# EAGLE board FINAL TRIWHEEL - Copy (EAGLE 9.6.0)
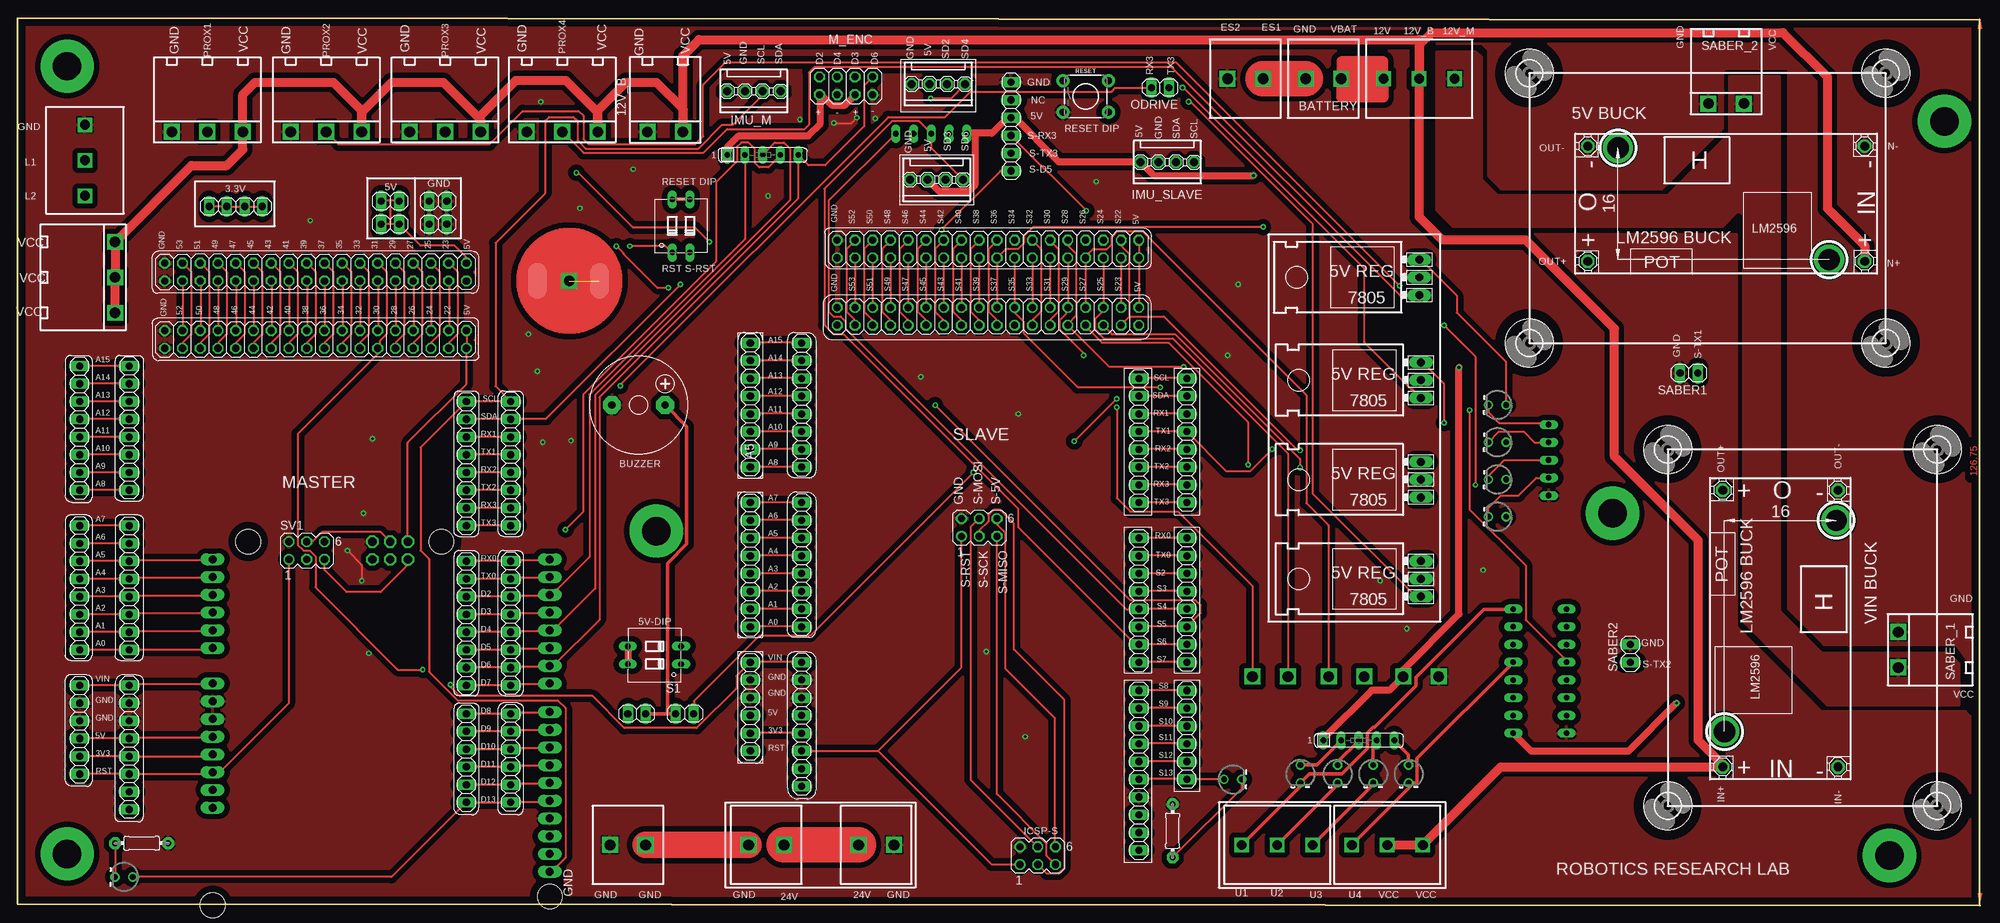
[diagram p0: board, top side]
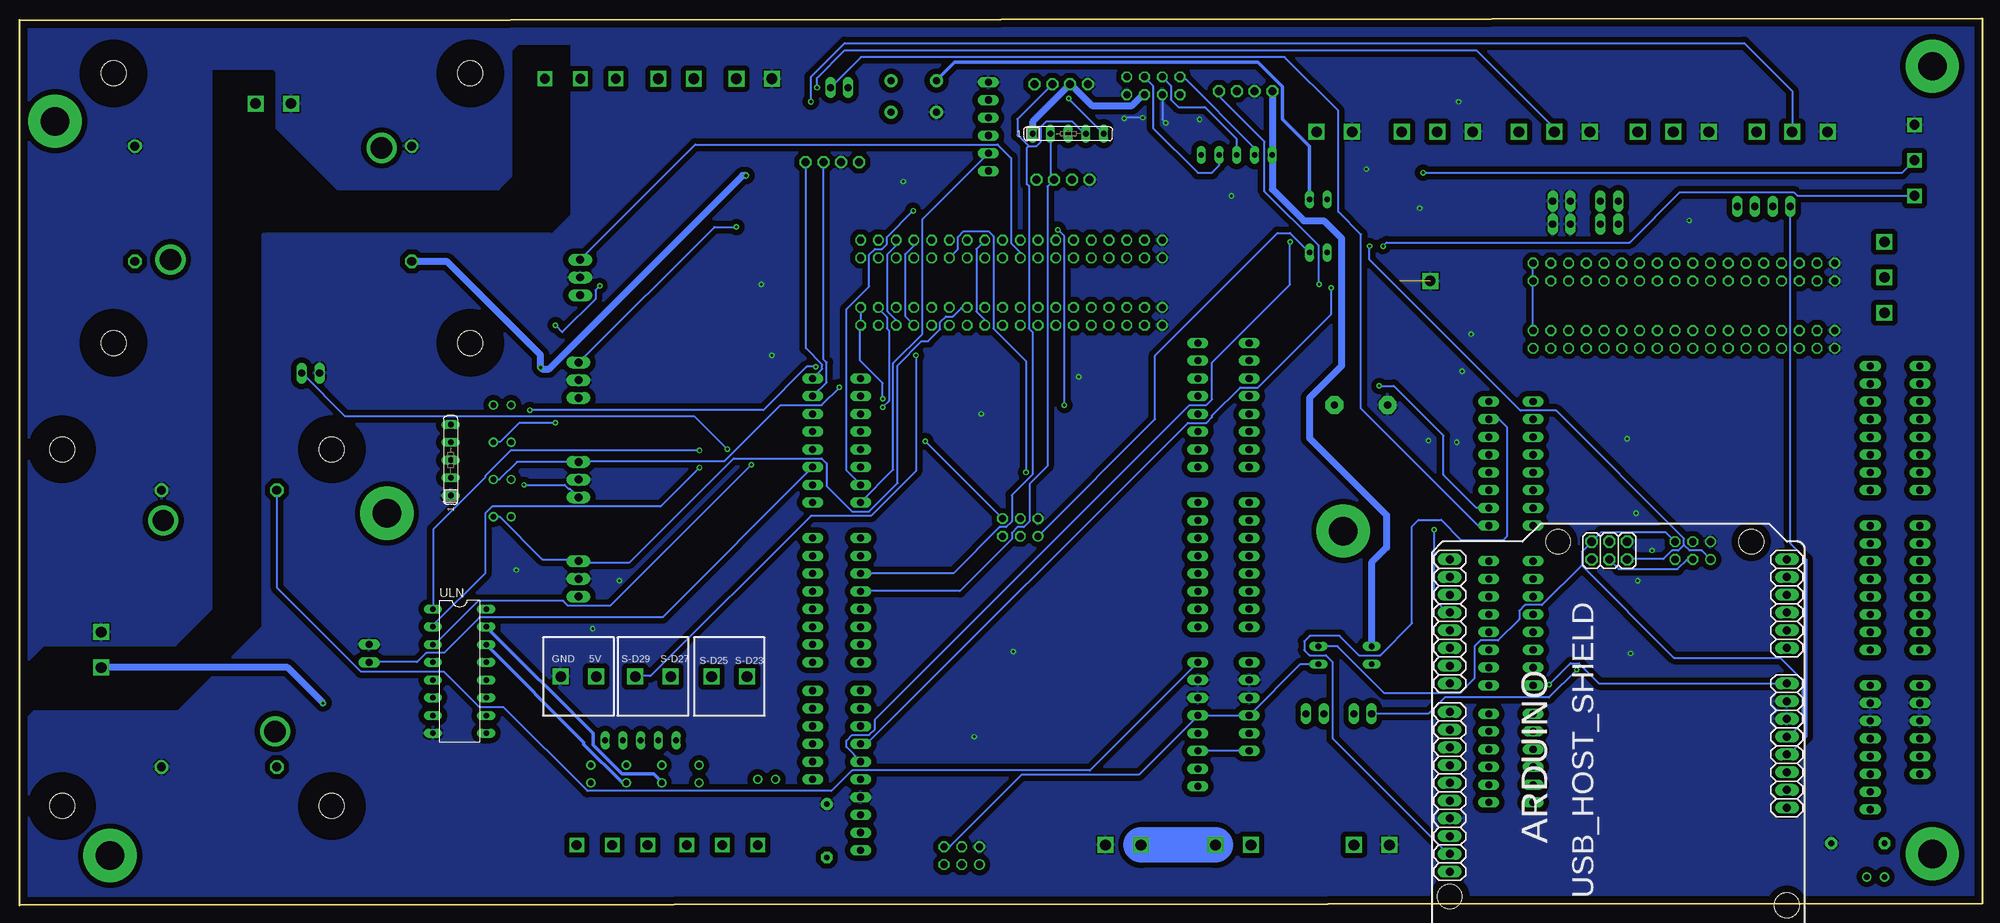
[diagram p1: board, bottom side, seen from below]

Size 280.92 x 127 mm. Coordinates in mm from the lower left corner, seen from the top.
Outline: 0,127 0,0.25 280.92,0 280.92,126.75 0,127
Copper layers (1*16): Top 0.035mm / dielectric 1.5mm / Bottom 0.035mm
Design rules "default *": minimum track width 12mil, minimum drill 0.35mm, track to track 12mil, track to pad 12mil, pad to pad 12mil, via to via 12mil, smd to smd 8mil, copper to edge 40mil, drill to drill 16mil, minimum pad ring 10mil, minimum via ring 8mil, stop-mask expansion 2mil, vias tented up to drill 0mil, thermal gap 10mil
Net classes: 0 default: width 0.305 mm, drill 0.33 mm, clearance 0.305 mm; 1 arduino: width 0.305 mm, drill 0.33 mm, clearance 0.305 mm; 2 signal: width 0.305 mm, drill 0.33 mm, clearance 0.305 mm to class 0, clearance 0.305 mm; 3 signal-1: width 0.508 mm, drill 0.381 mm, clearance 0.305 mm to class 0, clearance 0.305 mm to class 1, clearance 0.305 mm to class 2, clearance 0.305 mm; 4 signal-2: width 0.305 mm, drill 0.381 mm, clearance 0.305 mm to class 0, clearance 0.305 mm to class 1, clearance 0.305 mm to class 2, clearance 0.305 mm to class 3, clearance 0.305 mm; 5 signal-3: width 0.508 mm, drill 0.381 mm, clearance 0.305 mm to class 0, clearance 0.305 mm to class 1, clearance 0.305 mm to class 2, clearance 0.305 mm to class 3, clearance 0.305 mm to class 4, clearance 0.305 mm; 6 5v: width 1.016 mm, drill 0.406 mm, clearance 0.305 mm to class 0, clearance 0.305 mm to class 1, clearance 0.305 mm to class 2, clearance 0.305 mm to class 3, clearance 0.305 mm to class 4, clearance 0.305 mm to class 5, clearance 0.305 mm; 7 odrive: width 0.508 mm, drill 0.483 mm, clearance 0.305 mm; 8 nrf: width 0.305 mm, drill 0.33 mm, clearance 0.305 mm

## Footprints (pad centres in the part's own frame; a part is rotated, then mirrored left to right if it is on the bottom)
2X18 = drill 1.016 octagon: 1 -21.59,-1.27; 2 -21.59,1.27; 3 -19.05,-1.27; 4 -19.05,1.27; 5 -16.51,-1.27; 6 -16.51,1.27; 7 -13.97,-1.27; 8 -13.97,1.27; 9 -11.43,-1.27; 10 -11.43,1.27; 11 -8.89,-1.27; 12 -8.89,1.27; 13 -6.35,-1.27; 14 -6.35,1.27; 15 -3.81,-1.27; 16 -3.81,1.27; 17 -1.27,-1.27; 18 -1.27,1.27; 19 1.27,-1.27; 20 1.27,1.27; 21 3.81,-1.27; 22 3.81,1.27; 23 6.35,-1.27; 24 6.35,1.27; 25 8.89,-1.27; 26 8.89,1.27; 27 11.43,-1.27; 28 11.43,1.27; 29 13.97,-1.27; 30 13.97,1.27; 31 16.51,-1.27; 32 16.51,1.27; 33 19.05,-1.27; 34 19.05,1.27; 35 21.59,-1.27; 36 21.59,1.27
AB_RIGHT_TER_BLK = drill 1.524 square: 1 -5.842,2.794; 2 -5.842,-2.286
AB_SCREW_TERMINAL_5MM_2PIN = drill 1.524 square: 1 0,2.54; 2 0,-2.54
1X08 = drill 1.016 long: 1 -8.89,0; 2 -6.35,0; 3 -3.81,0; 4 -1.27,0; 5 1.27,0; 6 3.81,0; 7 6.35,0; 8 8.89,0
1X02 = drill 1.016 long: 1 -1.27,0; 2 1.27,0
LED_3MM-NS = drill 0.813: A -1.27,0; K 1.27,0
1X06 = drill 1.016 long: 1 -6.35,0; 2 -3.81,0; 3 -1.27,0; 4 1.27,0; 5 3.81,0; 6 6.35,0
3,6 = hole 3.6: 0,0
AB_4PIN_LOC_CONNECTOR = drill 1.143 octagon: 1 0,-3.81; 2 0,-1.27; 3 0,1.27; 4 0,3.81
1X04 = drill 1.016 long: 1 -3.81,0; 2 -1.27,0; 3 1.27,0; 4 3.81,0
AB_SCREW_TER_5MM_3PIN = drill 1.397 square: 1 2.54,5.08; 2 2.54,0; 3 2.54,-5.08
2X04 = drill 1.016 octagon: 1 -3.81,-1.27; 2 -3.81,1.27; 3 -1.27,-1.27; 4 -1.27,1.27; 5 1.27,-1.27; 6 1.27,1.27; 7 3.81,-1.27; 8 3.81,1.27
SIL5 = drill 0.813 long: 1 -5.08,0; 2 -2.54,0; 3 0,0; 4 2.54,0; 5 5.08,0
0204/7 = drill 0.813 pad 1.676 octagon: 1 -3.81,0; 2 3.81,0
TACTILE_SWITCH_PTH_6.0MM = drill 1.016 pad 1.88: 1 -3.251,2.261; 2 3.251,2.261; 3 -3.251,-2.261; 4 3.251,-2.261
DIP02YL = drill 0.813 long: 1 -1.27,-3.81; 2 1.27,-3.81; 3 1.27,3.81; 4 -1.27,3.81
1X10 = drill 1.016 long: 1 -11.43,0; 2 -8.89,0; 3 -6.35,0; 4 -3.81,0; 5 -1.27,0; 6 1.27,0; 7 3.81,0; 8 6.35,0; 9 8.89,0; 10 11.43,0
F/CM12P = drill 1.016 pad 2.54 octagon: + 3.81,0; - -3.81,0
MA03-2 = drill 1.016: 1 -2.54,-1.27 | drill 1.016 octagon: 2 -2.54,1.27; 3 0,-1.27; 4 0,1.27; 5 2.54,-1.27; 6 2.54,1.27
AB_LM2596_BUCK_CONVERTER = drill 1.27 octagon: IN+ -19.304,6.35; IN- -19.304,-10.16; OUT+ 20.32,6.35; OUT- 20.32,-10.16 | drill 3.048 pad 4.318: P$1 -14.224,6.096; P$2 16.002,-9.906
AB_RIGHT_TER_BLK_3PIN = drill 1.524 square: 1 -5.588,5.08; 2 -5.588,0; 3 -5.588,-5.08
AB_PLATED_DRILL_160MIL = drill 4.064 pad 7.62: 1 0,0
AB_JOINT_GND = smd 2.54 x 5.08: 1 4.318,0; 2 -4.572,0 | drill 1.524 square: 3 0,0
AB_7805_FLAT = drill 1.143 long: 1 -7.874,1.778; 2 -7.874,-0.762; 3 -7.874,-3.302
AB_USB_HOST_SHIELD_ARDUINO = drill 1.143 long: 3V3 1.27,-24.13; 5V1 3.81,-24.13; - -6.35,-24.13; A0 16.51,-24.13; A1 19.05,-24.13; A2 21.59,-24.13; A3 24.13,-24.13; A4 26.67,-24.13; A5 29.21,-24.13; AREF -10.414,24.13; D2 24.13,24.13; D3 21.59,24.13; D4 19.05,24.13; D5 16.51,24.13; D6 13.97,24.13; D7 11.43,24.13; D8 7.366,24.13; D9 4.826,24.13; D10 2.286,24.13; D11 -0.254,24.13; D12 -2.794,24.13; D13 -5.334,24.13; GND -7.874,24.13; GND2 8.89,-24.13; GND3 6.35,-24.13; RST1 -1.27,-24.13; RX0 29.21,24.13; SCL -15.494,24.13; SDA -12.954,24.13; TX0 26.67,24.13; VIN 11.43,-24.13; VREF -3.81,-24.13 | drill 1.168 octagon: 5V 31.75,3.81; GND1 31.75,-1.27; MISO 29.21,3.81; MOSI 31.75,1.27; RST 29.21,-1.27; SCK 29.21,1.27 | hole 3.56: 31.75,-19.05; 31.75,8.636; -19.05,24.13; -20.32,-24.13
DIL16 = drill 0.813 long: 1 -8.89,-3.81; 2 -6.35,-3.81; 3 -3.81,-3.81; 4 -1.27,-3.81; 5 1.27,-3.81; 6 3.81,-3.81; 7 6.35,-3.81; 8 8.89,-3.81; 9 8.89,3.81; 10 6.35,3.81; 11 3.81,3.81; 12 1.27,3.81; 13 -1.27,3.81; 14 -3.81,3.81; 15 -6.35,3.81; 16 -8.89,3.81

## Placement (x,y rotation side)
5V_GND  A4  [2X18]  42.67,90.68 180 top
12V_B  AB_RIGHT_TER_BLK  [AB_RIGHT_TER_BLK]  92.96,116.59 90 top
24_BAT  AB_SCREW_TERMINAL_5MM_2PIN  [AB_SCREW_TERMINAL_5MM_2PIN]  107.19,8.64 270 top
_A0_A7  A6  [1X08]  16,45.47 90 top
A0_A7  A6  [1X08]  8.89,45.47 270 top
A5  A5  [1X08]  104.9,71.63 270 top
A8_A15  A5  [1X08]  16,68.33 270 top
BATTERY  AB_SCREW_TERMINAL_5MM_2PIN  [AB_SCREW_TERMINAL_5MM_2PIN]  186.94,118.36 270 top
BUZZ-S  [1X02]  95.5,27.43 0 top
BUZZ_M  [1X02]  88.65,27.43 180 top
D1  [LED_3MM-NS]  211.84,55.63 180 top
D2  [LED_3MM-NS]  211.84,60.96 180 top
D3  [LED_3MM-NS]  211.84,66.29 180 top
D4  [LED_3MM-NS]  211.84,71.63 180 top
D5  [LED_3MM-NS]  173.99,18.03 0 top
D6  [LED_3MM-NS]  183.64,18.8 270 top
D7  [LED_3MM-NS]  188.98,18.8 270 top
D7_RX0  A2  [1X08]  64.26,40.39 90 top
D8  [LED_3MM-NS]  194.06,18.8 270 top
D9  [LED_3MM-NS]  199.14,18.8 270 top
D13  [LED_3MM-NS]  15.24,4.06 180 top
D13_D8  A1  [1X06]  64.26,21.08 90 top
ESTOP  AB_SCREW_TERMINAL_5MM_2PIN  [AB_SCREW_TERMINAL_5MM_2PIN]  87.38,8.64 90 top
H1  MOUNT-HOLE3.6  [3,6]  274.83,65.28 0 top
H2  MOUNT-HOLE3.6  [3,6]  267.46,119.13 0 top
H3  MOUNT-HOLE3.6  [3,6]  216.41,119.13 0 top
H4  MOUNT-HOLE3.6  [3,6]  267.46,80.52 0 top
H5  MOUNT-HOLE3.6  [3,6]  216.41,80.52 0 top
H6  MOUNT-HOLE3.6  [3,6]  274.83,14.22 0 top
H7  MOUNT-HOLE3.6  [3,6]  236.22,65.28 0 top
H8  MOUNT-HOLE3.6  [3,6]  236.22,14.22 0 top
IMU_M  AB_4PIN_LOC_CONNECTOR  [AB_4PIN_LOC_CONNECTOR]  105.41,116.59 90 top
IMU_SLAVE  AB_4PIN_LOC_CONNECTOR  [AB_4PIN_LOC_CONNECTOR]  164.59,106.43 90 top
JP  A5  [1X08]  8.89,68.33 90 top
JP1  [1X06]  142.24,111.51 270 top
JP2  [1X02]  53.34,100.84 0 top
JP3  [1X02]  53.34,97.54 0 top
JP4  A1  [1X06]  70.61,21.08 270 top
JP5  [1X02]  60.2,100.84 0 top
JP6  A2  [1X08]  70.61,40.39 270 top
JP7  [1X02]  60.2,97.54 0 top
JP8  A3  [1X08]  70.61,63.25 270 top
JP9  [1X04]  31.24,100.08 0 top
JP13  A7  [1X06]  8.89,25.15 90 top
JP17  A4  [2X18]  42.67,81.03 180 top
LIMIT_SWITCH  [AB_SCREW_TER_5MM_3PIN]  12.19,106.68 180 top
M_ENC  ENCODER  [2X04]  118.62,117.35 0 top
MAIN_SUPPLY  AB_SCREW_TER_5MM_3PIN  [AB_SCREW_TER_5MM_3PIN]  200.66,115.82 90 top
MAIN_SUPPLY1  AB_SCREW_TER_5MM_3PIN  [AB_SCREW_TER_5MM_3PIN]  196.09,11.18 270 top
ODRIVE  [1X02]  163.58,117.09 180 top
PULL_RESISTOR-M  [SIL5]  106.68,107.44 0 top
R2  4.7k  [0204/7]  17.78,8.89 180 top
R3  4.7k  [0204/7]  165.35,10.67 270 top
RESET  1  [TACTILE_SWITCH_PTH_6.0MM]  152.91,115.82 0 top
RN1  [SIL5]  219.2,63.75 90 bottom
RN3  [SIL5]  192.02,23.62 0 top
RST_VIN  A7  [1X08]  16,22.61 270 top
S1  [DIP02YL]  91.19,35.81 90 top
S4  [DIP02YL]  95,97.28 0 top
S-5V_GND1  A4  [2X18]  138.94,84.33 180 top
S-A0_A7  A6  [1X08]  112.27,48.77 270 top
S-D7_RX0  A2  [1X08]  160.53,43.69 90 top
S-D8_D13  [1X10]  160.53,19.3 90 top
S-ENC  [SIL5]  130.81,110.49 0 bottom
S-RST_VIN1  A7  [1X08]  112.27,25.91 270 top
S-TX3_SCL1  A3  [1X08]  160.53,66.55 90 top
S_A8_A15  A5  [1X08]  112.27,71.63 90 top
SABER1  [1X02]  239.27,76.2 180 top
SABER2  [1X02]  230.89,36.07 90 top
SABER_1  AB_RIGHT_TER_BLK  [AB_RIGHT_TER_BLK]  275.08,36.32 0 top
SABER_2  AB_RIGHT_TER_BLK  [AB_RIGHT_TER_BLK]  244.86,120.65 90 top
SG1  F/CM12P  [F/CM12P]  88.9,71.63 0 top
SLAVE-1  A1  [1X06]  167.39,24.38 270 top
SLAVE-2  A2  [1X08]  167.39,43.69 270 top
SLAVE-3  A3  [1X08]  167.39,66.55 270 top
SLAVE-4  A4  [2X18]  138.94,93.98 180 top
SLAVE-6  A6  [1X08]  104.9,48.77 90 top
SLAVE-7  A7  [1X06]  104.9,28.45 90 top
SV1  A8  [MA03-2]  41.4,50.8 0 top
SV2  A8  [MA03-2]  137.67,54.1 0 top
SV3  A8  [MA03-2]  146.05,7.11 0 top
TX3_SCL  A3  [1X08]  64.26,63.25 90 top
U$1  AB_LM2596_BUCK_CONVERTER  [AB_LM2596_BUCK_CONVERTER]  250.44,39.12 90 top
U$2  AB_LM2596_BUCK_CONVERTER  [AB_LM2596_BUCK_CONVERTER]  245.11,98.55 180 top
U$4  AB_RIGHT_TER_BLK_3PIN  [AB_RIGHT_TER_BLK_3PIN]  27.18,116.33 90 top
U$5  AB_RIGHT_TER_BLK_3PIN  [AB_RIGHT_TER_BLK_3PIN]  8.38,89.92 180 top
U$6  AB_RIGHT_TER_BLK_3PIN  [AB_RIGHT_TER_BLK_3PIN]  44.2,116.33 90 top
U$7  AB_SCREW_TER_5MM_3PIN  [AB_SCREW_TER_5MM_3PIN]  180.34,11.18 270 top
U$8  AB_SCREW_TERMINAL_5MM_2PIN  [AB_SCREW_TERMINAL_5MM_2PIN]  122.94,8.64 90 top
U$9  AB_PLATED_DRILL_160MIL  [AB_PLATED_DRILL_160MIL]  7.11,7.37 0 top
U$10  AB_JOINT_GND  [AB_JOINT_GND]  78.99,89.41 0 top
U$11  AB_RIGHT_TER_BLK_3PIN  [AB_RIGHT_TER_BLK_3PIN]  61.21,116.33 90 top
U$12  AB_SCREW_TERMINAL_5MM_2PIN  [AB_SCREW_TERMINAL_5MM_2PIN]  179.32,32.77 270 bottom
U$13  AB_SCREW_TERMINAL_5MM_2PIN  [AB_SCREW_TERMINAL_5MM_2PIN]  190.25,32.77 270 bottom
U$15  AB_PLATED_DRILL_160MIL  [AB_PLATED_DRILL_160MIL]  267.97,7.11 0 top
U$16  AB_RIGHT_TER_BLK_3PIN  [AB_RIGHT_TER_BLK_3PIN]  77.98,116.33 90 top
U$17  AB_7805_FLAT  [AB_7805_FLAT]  193.04,45.97 180 top
U$18  AB_7805_FLAT  [AB_7805_FLAT]  193.04,60.2 180 top
U$19  AB_7805_FLAT  [AB_7805_FLAT]  193.04,74.42 180 top
U$20  AB_7805_FLAT  [AB_7805_FLAT]  192.79,89.15 180 top
U$21  en1  [AB_4PIN_LOC_CONNECTOR]  131.83,117.6 90 top
U$22  en2  [AB_4PIN_LOC_CONNECTOR]  131.57,103.89 90 top
U$23  AB_PLATED_DRILL_160MIL  [AB_PLATED_DRILL_160MIL]  275.84,112.27 0 top
U$24  AB_PLATED_DRILL_160MIL  [AB_PLATED_DRILL_160MIL]  91.44,53.59 0 top
U$25  AB_PLATED_DRILL_160MIL  [AB_PLATED_DRILL_160MIL]  228.35,56.13 0 top
U$26  AB_PLATED_DRILL_160MIL  [AB_PLATED_DRILL_160MIL]  7.11,120.14 0 top
U$27  AB_SCREW_TERMINAL_5MM_2PIN  [AB_SCREW_TERMINAL_5MM_2PIN]  200.91,32.77 270 bottom
U$28  AB_SCREW_TERMINAL_5MM_2PIN  [AB_SCREW_TERMINAL_5MM_2PIN]  175.77,118.36 90 top
U$29  AB_USB_HOST_SHIELD_ARDUINO  [AB_USB_HOST_SHIELD_ARDUINO]  52.07,20.32 90 bottom
ULN  [DIL16]  217.93,33.53 270 bottom

## Library data of the parts
5V_GND _A0_A7 A0_A7 A5 A8_A15 BUZZ-S BUZZ_M D7_RX0 D13_D8 JP JP1-JP9 JP13 JP17 M_ENC ODRIVE RST_VIN S-5V_GND1 S-A0_A7 S-D7_RX0 S-D8_D13 S-RST_VIN1 S-TX3_SCL1 S_A8_A15 SABER1 SABER2 SLAVE-1-SLAVE-4 SLAVE-6 SLAVE-7 TX3_SCL = pinhead
12V_B SABER_1 SABER_2 U$4-U$6 U$11 U$16 = AB_Right_angle_terminal_block
24_BAT BATTERY ESTOP U$8 U$12 U$13 U$27 U$28 = AB_SCREW_TER_5MM_2PIN_BIG
D1-D9 D13 = SparkFun-LED
H1-H8 = holes
IMU_M IMU_SLAVE U$21 U$22 = AB_LOCKING CONNECTORS
LIMIT_SWITCH MAIN_SUPPLY MAIN_SUPPLY1 U$7 = AB_SCREW_TER_5MM_3PIN_BIG
PULL_RESISTOR-M RN1 RN3 S-ENC = resistor-sil; OC_FARNELL: unknown; OC_NEWARK: unknown
R2 R3 = adafruit
RESET = SparkFun-Switches; PROD_ID: SWCH-08441; SF_SKU: COM-00097
S1 S4 = switch-dil; OC_FARNELL: unknown; OC_NEWARK: unknown
SG1 = buzzer; OC_FARNELL: unknown; OC_NEWARK: unknown
SV1-SV3 = con-lstb; OC_FARNELL: unknown; OC_NEWARK: unknown
U$1 U$2 = AB_Voltage_converters_updated 29-07-2019
U$9 U$15 U$23-U$26 = AB_ plated drill 160 mil
U$10 = AB_Star_GND
U$17-U$20 = AB_7805_FLAT
U$29 = AB_ARDUINO_USB_HOST_SHIELD_updated 29-07-2019
ULN = ic-package

## Nets
3V3A [nrf]: JP9.1 JP9.2 JP9.3 JP9.4 JP13.2 RST_VIN.5 U$29.3V3
5V [5v]: IMU_M.4 IMU_SLAVE.4 JP1.3 M_ENC.1 M_ENC.5 PULL_RESISTOR-M.1 RN3.1 S1.3 S1.4 S-ENC.1 U$2.OUT+ U$21.3 U$22.3 U$27.1
5VS [signal]: 5V_GND.1 5V_GND.2 JP2.1 JP2.2 JP3.1 JP3.2 JP13.3 JP17.1 JP17.2 RST_VIN.4 S1.2 SV1.6 U$29.5V U$29.5V1
12V: MAIN_SUPPLY.3 SABER_1.2 SABER_2.2 ULN.9
12V_B: 12V_B.2 MAIN_SUPPLY1.1 MAIN_SUPPLY1.2 MAIN_SUPPLY.2 U$1.IN+ U$2.IN+ U$4.3 U$5.1 U$5.2 U$5.3 U$6.3 U$11.3 U$16.3
24V: 24_BAT.1 U$8.1
A0 [arduino]: _A0_A7.1 A0_A7.8 U$29.A0
A1 [arduino]: _A0_A7.2 A0_A7.7 U$29.A1
A2 [arduino]: _A0_A7.3 A0_A7.6 U$29.A2
A3 [arduino]: _A0_A7.4 A0_A7.5 U$29.A3
A4 [arduino]: _A0_A7.5 A0_A7.4 U$29.A4
A5 [arduino]: _A0_A7.6 A0_A7.3 U$29.A5
A6 [arduino]: _A0_A7.7 A0_A7.2
A7 [arduino]: _A0_A7.8 A0_A7.1
A8 [arduino]: A8_A15.8 JP.1
A9 [arduino]: A8_A15.7 JP.2
A10 [arduino]: A8_A15.6 JP.3
A11 [arduino]: A8_A15.5 JP.4
A12 [arduino]: A8_A15.4 JP.5
A13 [arduino]: A8_A15.3 JP.6
A14 [arduino]: A8_A15.2 JP.7
A15 [arduino]: A8_A15.1 JP.8
AREF [signal-2]: S-D8_D13.3
D2 [arduino]: D7_RX0.6 JP6.3 M_ENC.2 PULL_RESISTOR-M.2 U$29.D2
D3 [arduino]: D7_RX0.5 JP6.4 M_ENC.6 PULL_RESISTOR-M.4 U$29.D3
D4 [arduino]: D7_RX0.4 JP6.5 M_ENC.4 PULL_RESISTOR-M.3 U$29.D4
D5 [arduino]: D7_RX0.3 JP6.6 U$29.D5
D6 [arduino]: D7_RX0.2 JP6.7 M_ENC.8 PULL_RESISTOR-M.5 U$29.D6
D7 [arduino]: D7_RX0.1 JP6.8 U$29.D7
D8 [arduino]: D13_D8.6 JP4.1 U$29.D8
D9 [arduino]: D13_D8.5 JP4.2 U$29.D9
D10 [arduino]: D13_D8.4 JP4.3 U$29.D10
D11 [arduino]: D13_D8.3 JP4.4 U$29.D11
D12 [arduino]: D13_D8.2 JP4.5 U$29.D12
D13 [arduino]: D13.A D13_D8.1 JP4.6 U$29.D13
D22 [signal]: 5V_GND.4 JP17.3
D23 [arduino]: 5V_GND.3 JP17.4
D24 [signal]: 5V_GND.6 JP17.5
D25 [signal]: 5V_GND.5 JP17.6
D26 [signal]: 5V_GND.8 JP17.7
D27 [signal]: 5V_GND.7 JP17.8
D28 [signal]: 5V_GND.10 JP17.9
D29 [arduino]: 5V_GND.9 JP17.10
D30 [signal]: 5V_GND.12 JP17.11
D31 [arduino]: 5V_GND.11 BUZZ_M.2 JP17.12
D32 [signal]: 5V_GND.14 JP17.13
D33 [arduino]: 5V_GND.13 JP17.14
D34 [signal]: 5V_GND.16 JP17.15
D35 [arduino]: 5V_GND.15 JP17.16
D36 [signal]: 5V_GND.18 JP17.17
D37 [arduino]: 5V_GND.17 JP17.18
D38 [signal]: 5V_GND.20 JP17.19
D39 [arduino]: 5V_GND.19 JP17.20
D40 [signal]: 5V_GND.22 JP17.21
D41 [arduino]: 5V_GND.21 JP17.22
D42 [signal]: 5V_GND.24 JP17.23
D43 [arduino]: 5V_GND.23 JP17.24
D44 [signal]: 5V_GND.26 JP17.25
D45 [arduino]: 5V_GND.25 JP17.26
D46 [signal]: 5V_GND.28 JP17.27
D47 [arduino]: 5V_GND.27 JP17.28
D48 [signal]: 5V_GND.30 JP17.29
D49 [signal]: 5V_GND.29 JP17.30
D50 [signal]: 5V_GND.32 JP17.31
D51 [signal]: 5V_GND.31 JP17.32
D52 [signal]: 5V_GND.34 JP17.33
D53 [signal]: 5V_GND.33 JP17.34
GND: 5V_GND.35 5V_GND.36 12V_B.1 ESTOP.1 IMU_M.3 IMU_SLAVE.3 JP1.1 JP5.1 JP5.2 JP7.1 JP7.2 JP13.4 JP13.5 JP17.35 JP17.36 LIMIT_SWITCH.3 M_ENC.3 M_ENC.7 R2.1 R3.1 RESET.3 RN1.1 RST_VIN.2 RST_VIN.3 S-5V_GND1.35 S-5V_GND1.36 S-D8_D13.4 S-RST_VIN1.2 S-RST_VIN1.3 SABER1.2 SABER2.2 SABER_1.1 SABER_2.1 SG1.- SLAVE-4.35 SLAVE-4.36 SLAVE-7.4 SLAVE-7.5 SV1.2 SV2.2 SV3.2 U$1.IN- U$1.OUT- U$2.IN- U$2.OUT- U$4.1 U$6.1 U$8.2 U$10.1 U$10.2 U$10.3 U$11.1 U$16.1 U$17.2 U$18.2 U$19.2 U$20.2 U$21.4 U$22.4 U$27.2 U$28.1 U$29.GND U$29.GND1 U$29.GND2 U$29.GND3 ULN.8
GND_B: BATTERY.2 U$28.2
GND_O [odrive]: 24_BAT.2 ESTOP.2
MISO [signal]: SV1.5 U$29.MISO
MOSI [signal]: SV1.4 U$29.MOSI
N$2: D5.K R3.2
N$3 [signal-3]: BUZZ-S.1 BUZZ_M.1 SG1.+
N$5: D1.K RN1.2
N$6: D2.K RN1.3
N$7 [signal-3]: D6.K U$7.3 ULN.16
N$8 [signal-3]: D7.K U$7.2 ULN.15
N$9 [signal-3]: D8.K U$7.1 ULN.14
N$10 [signal-3]: D9.K MAIN_SUPPLY1.3 ULN.13
N$12 [signal-1]: D6.A RN3.2
N$13 [signal-1]: D7.A RN3.3
N$14 [signal-1]: D8.A RN3.4
N$15 [signal-1]: D9.A RN3.5
N$16 [signal-3]: RESET.1 S4.3 S4.4
N$19: U$29.VREF
N$20: D3.K RN1.4
N$21: D4.K RN1.5
N$32 [signal-1]: ULN.5
N$33 [signal-1]: ULN.6
N$34 [signal-1]: ULN.7
N$140 [signal]: D13.K R2.2
NC: JP1.2
PROX_1: U$4.2 U$17.1
PROX_2: U$6.2 U$18.1
PROX_3: U$11.2 U$19.1
PROX_4: U$16.2 U$20.1
RST [arduino]: JP13.1 RST_VIN.6 S4.1 SV1.1 U$29.RST U$29.RST1
RX0 [arduino]: D7_RX0.8 JP6.1 U$29.RX0
RX1 [arduino]: JP8.3 TX3_SCL.6
RX2 [arduino]: JP8.5 TX3_SCL.4
RX3 [arduino]: JP8.7 ODRIVE.2 TX3_SCL.2
S-3V3A [signal-2]: S-RST_VIN1.5 SLAVE-7.2
S-5VS [signal-2]: S1.1 S-5V_GND1.1 S-5V_GND1.2 S-RST_VIN1.4 SLAVE-4.1 SLAVE-4.2 SLAVE-7.3 SV2.6 SV3.6
S-A0 [signal-2]: S-A0_A7.8 SLAVE-6.1
S-A1 [signal-2]: S-A0_A7.7 SLAVE-6.2
S-A2 [signal-2]: S-A0_A7.6 SLAVE-6.3
S-A3 [signal-2]: S-A0_A7.5 SLAVE-6.4
S-A4 [signal-2]: S-A0_A7.4 SLAVE-6.5
S-A5 [signal-2]: S-A0_A7.3 SLAVE-6.6
S-A6 [signal-2]: S-A0_A7.2 SLAVE-6.7
S-A7 [signal-2]: S-A0_A7.1 SLAVE-6.8
S-A8 [signal-2]: A5.8 S_A8_A15.1
S-A9 [signal-2]: A5.7 S_A8_A15.2
S-A10 [signal-2]: A5.6 S_A8_A15.3
S-A11 [signal-2]: A5.5 S_A8_A15.4
S-A12 [signal-2]: A5.4 S_A8_A15.5
S-A13 [signal-2]: A5.3 S_A8_A15.6
S-A14 [signal-2]: A5.2 S_A8_A15.7
S-A15 [signal-2]: A5.1 S_A8_A15.8
S-D2 [signal-2]: S-D7_RX0.6 S-ENC.4 SLAVE-2.3 U$21.2
S-D3 [signal-2]: S-D7_RX0.5 S-ENC.2 SLAVE-2.4 U$22.2
S-D4 [signal-2]: S-D7_RX0.4 S-ENC.5 SLAVE-2.5 U$21.1
S-D5 [signal-2]: JP1.6 S-D7_RX0.3 SLAVE-2.6
S-D6 [signal-2]: S-D7_RX0.2 S-ENC.3 SLAVE-2.7 U$22.1
S-D7 [signal-2]: S-D7_RX0.1 SLAVE-2.8
S-D8 [signal-2]: S-D8_D13.10 SLAVE-1.1
S-D9 [signal-2]: S-D8_D13.9 SLAVE-1.2
S-D10 [signal-2]: S-D8_D13.8 SLAVE-1.3
S-D11 [signal-2]: LIMIT_SWITCH.1 S-D8_D13.7 SLAVE-1.4
S-D12 [signal-2]: LIMIT_SWITCH.2 S-D8_D13.6 SLAVE-1.5
S-D13 [signal-2]: D5.A S-D8_D13.5 SLAVE-1.6
S-D22 [signal-2]: S-5V_GND1.4 SLAVE-4.3 ULN.1
S-D23 [signal-2]: S-5V_GND1.3 SLAVE-4.4 U$12.1
S-D24 [signal-2]: S-5V_GND1.6 SLAVE-4.5 ULN.2
S-D25 [signal-2]: S-5V_GND1.5 SLAVE-4.6 U$12.2
S-D26 [signal-2]: S-5V_GND1.8 SLAVE-4.7 ULN.3
S-D27 [signal-2]: S-5V_GND1.7 SLAVE-4.8 U$13.1
S-D28 [signal-2]: S-5V_GND1.10 SLAVE-4.9 ULN.4
S-D29 [signal-2]: S-5V_GND1.9 SLAVE-4.10 U$13.2
S-D30 [signal-2]: S-5V_GND1.12 SLAVE-4.11
S-D31 [signal-2]: BUZZ-S.2 S-5V_GND1.11 SLAVE-4.12
S-D32 [signal-2]: S-5V_GND1.14 SLAVE-4.13
S-D33 [signal-2]: D1.A S-5V_GND1.13 SLAVE-4.14 U$17.3
S-D34 [signal-2]: S-5V_GND1.16 SLAVE-4.15
S-D35 [signal-2]: D2.A S-5V_GND1.15 SLAVE-4.16 U$18.3
S-D36 [signal-2]: S-5V_GND1.18 SLAVE-4.17
S-D37 [signal-2]: D3.A S-5V_GND1.17 SLAVE-4.18 U$19.3
S-D38 [signal-2]: S-5V_GND1.20 SLAVE-4.19
S-D39 [signal-2]: D4.A S-5V_GND1.19 SLAVE-4.20 U$20.3
S-D40 [signal-2]: S-5V_GND1.22 SLAVE-4.21
S-D41 [signal-2]: S-5V_GND1.21 SLAVE-4.22
S-D42 [signal-2]: S-5V_GND1.24 SLAVE-4.23
S-D43 [signal-2]: S-5V_GND1.23 SLAVE-4.24
S-D44 [signal-2]: S-5V_GND1.26 SLAVE-4.25
S-D45 [signal-2]: S-5V_GND1.25 SLAVE-4.26
S-D46 [signal-2]: S-5V_GND1.28 SLAVE-4.27
S-D47 [signal-2]: S-5V_GND1.27 SLAVE-4.28
S-D48 [signal-2]: S-5V_GND1.30 SLAVE-4.29
S-D49 [signal-2]: S-5V_GND1.29 SLAVE-4.30
S-D50 [signal-2]: S-5V_GND1.32 SLAVE-4.31
S-D51 [signal-2]: S-5V_GND1.31 SLAVE-4.32
S-D52 [signal-2]: S-5V_GND1.34 SLAVE-4.33
S-D53 [signal-2]: S-5V_GND1.33 SLAVE-4.34
S-MISO [signal-2]: SV2.5 SV3.5
S-MOSI [signal-2]: SV2.4 SV3.4
S-RST [signal-2]: S4.2 S-RST_VIN1.6 SLAVE-7.1 SV2.1 SV3.1
S-RX0 [signal-2]: S-D7_RX0.8 SLAVE-2.1
S-RX1 [signal-2]: S-TX3_SCL1.6 SLAVE-3.3
S-RX2 [signal-2]: S-TX3_SCL1.4 SLAVE-3.5
S-RX3 [signal-2]: JP1.4 S-TX3_SCL1.2 SLAVE-3.7
S-SCK [signal-2]: SV2.3 SV3.3
S-SCL [signal-2]: IMU_SLAVE.1 S-TX3_SCL1.8 SLAVE-3.1
S-SDA [signal-2]: IMU_SLAVE.2 S-TX3_SCL1.7 SLAVE-3.2
S-TX0 [signal-2]: S-D7_RX0.7 SLAVE-2.2
S-TX1 [signal-2]: S-TX3_SCL1.5 SABER1.1 SLAVE-3.4
S-TX2 [signal-2]: S-TX3_SCL1.3 SABER2.1 SLAVE-3.6
S-TX3 [signal-2]: JP1.5 S-TX3_SCL1.1 SLAVE-3.8
SCK [signal]: SV1.3 U$29.SCK
SCL [arduino]: IMU_M.2 JP8.1 TX3_SCL.8 U$29.SCL
SCL_SL [signal-2]: S-D8_D13.1
SDA [arduino]: IMU_M.1 JP8.2 TX3_SCL.7 U$29.SDA
SDA_SL [signal-2]: S-D8_D13.2
TX0 [arduino]: D7_RX0.7 JP6.2 U$29.TX0
TX1 [arduino]: JP8.4 TX3_SCL.5
TX2 [arduino]: JP8.6 TX3_SCL.3
TX3 [arduino]: JP8.8 ODRIVE.1 TX3_SCL.1
VBAT: BATTERY.1 MAIN_SUPPLY.1
VIN [arduino]: JP13.6 RST_VIN.1 S-RST_VIN1.1 SLAVE-7.6 U$1.OUT+ U$29.VIN

## Tracks (layer width: path | path; a pad name or v marks a point on that pad's centre or on a via)
3V3A
  Top 0.305: JP9.1 JP9.2 JP9.3 JP9.4 | JP13.2 RST_VIN.5 16.05,21.29 27.94,21.29 U$29.3V3
  Bottom 0.305: JP9.1 27.43,51.82 25.09,49.48 25.09,24.18 27.63,21.64 27.94,21.64 U$29.3V3
5V  (via drill 0.41)
  Top 1.016: RN3.1 186.94,23.88 193.85,30.79 196.39,30.79 U$27.1 198.37,33.73 206.35,41.71 v206.35,77.01 | M_ENC.5 119.89,116.03 118.36,114.5 116.64,114.5 115.11,116.03 114.81,116.03 M_ENC.1 114.86,116.03 114.86,111.87 113.18,110.19 103.23,110.19 101.6,108.55 PULL_RESISTOR-M.1 | 137.06,110.54 139.5,110.54 141.73,112.78 JP1.3 142.44,112.98 142.54,112.98 149.05,106.48 160.73,106.48 IMU_SLAVE.4 162.71,104.5 v176.94,104.5 | 137.06,110.54 135.94,110.54 S-ENC.1 | U$22.3 131.98,102.21 136.14,102.21 137.06,103.12 137.06,110.54 | S1.3 S1.4
  Bottom 1.016: U$2.OUT+ 224.74,92.15 219.71,92.15 206.35,78.79 v206.35,77.01 206.15,76.81 205.13,76.81 177.44,104.5 v176.94,104.5 | S-ENC.1 135.84,110.54 135.84,112.27 130.56,117.55 U$21.3 130.5,117.6 127.41,114.5 121.72,114.5 120.19,116.03 119.89,116.03 M_ENC.5 | IMU_M.4 PULL_RESISTOR-M.1 101.6,102.54 97.08,98.02 94.21,98.02 91.69,95.5 91.69,77.22 96.27,72.64 96.27,66.9 85.24,55.88 85.24,51.21 87.38,49.07 S1.3
5VS
  Top 0.305: 53.34,97.54 JP3.2 57.71,94.44 62.59,94.44 64.26,92.76 5V_GND.1 | 53.34,97.54 JP3.1 | 53.34,100.89 54.56,100.89 JP2.2 | 53.34,100.89 52.12,100.89 JP2.1 | 53.34,100.89 53.34,97.54 | JP17.1 64.31,82.3 64.31,79.76 JP17.2 64.26,74.62 55.88,66.24 U$29.5V | JP13.3 RST_VIN.4 16.46,23.88 16.66,24.08 27.94,24.08 U$29.5V1
  Bottom 0.305: S1.2 92.25,37.08 85.55,30.38 74.78,30.38 72.64,32.51 72.64,37.08 71.83,37.9 69.29,37.9 66.24,40.95 66.24,42.16 65.43,42.98 62.99,42.98 57.3,48.67 | 57.3,48.67 57.3,50.6 55.88,52.02 U$29.5V 54.51,53.44 45.31,53.44 SV1.6 | 57.3,48.67 44.09,35.46 28.85,35.46 25.7,32.31 25.7,26.11 27.63,24.18 27.94,24.18 U$29.5V1 | JP17.1 5V_GND.2 5V_GND.1
12V  (via drill 0.41)
  Top 1.016: ULN.9 216.66,22.1 230.63,22.1 v237.49,28.96
  Bottom 1.016: v237.49,28.96 242.57,34.04 SABER_1.2
  pour Top: 277.88,34.54 276.35,36.07 258.32,36.07 252.22,42.16 252.22,118.62 245.11,118.62 245.11,110.49 236.22,101.6 211.84,101.6 209.55,103.89 209.55,121.41 208.79,122.17 203.2,122.17 203.2,99.57 205.49,97.28 244.09,97.28 246.13,99.31 246.63,99.31 247.14,98.81 247.14,40.64 259.08,28.7 277.88,28.7
12V_B
  Top 1.27: MAIN_SUPPLY.2 200.66,123.19 202.44,124.97 252.73,124.97 259.08,118.62 259.08,99.82 264.41,94.49 U$2.IN+ | MAIN_SUPPLY.2 200.66,98.55 203.96,95.25 215.9,95.25 228.6,82.55 228.6,64.26 240.59,52.27 240.59,23.65 244.09,20.15 U$1.IN+ 212.34,19.81 MAIN_SUPPLY1.1 MAIN_SUPPLY1.2 | MAIN_SUPPLY.2 200.66,123.95 97.54,123.95 95.25,121.67 12V_B.2 95.25,114.05 91.44,117.86 87.12,117.86 83.06,113.79 U$16.3 83.06,113.54 78.49,118.11 71.37,118.11 66.29,113.03 U$11.3 66.29,112.52 60.96,117.86 53.59,117.86 49.28,113.54 U$6.3 49.28,113.79 45.21,117.86 34.04,117.86 32.26,116.08 U$4.3 32.26,108.2 29.97,105.92 24.89,105.92 U$5.3 13.99,94.97 13.99,89.94 U$5.2 U$5.1
24V
  Top 5.08: 24_BAT.1 U$8.1
  Bottom 5.08: 24_BAT.1 U$8.1
A0
  Top 0.305: A0_A7.8 _A0_A7.1 27.94,36.58 U$29.A0
A1
  Top 0.305: A0_A7.7 _A0_A7.2 16.2,39.12 16.41,39.32 27.94,39.32 U$29.A1
A2
  Top 0.305: A0_A7.6 _A0_A7.3 16.2,41.66 16.41,41.86 27.94,41.86 U$29.A2
A3
  Top 0.305: A0_A7.5 _A0_A7.4 16.2,44.2 16.41,44.4 27.94,44.4 U$29.A3
A4
  Top 0.305: A0_A7.4 _A0_A7.5 16.2,46.74 16.41,46.94 27.94,46.94 U$29.A4
A5
  Top 0.305: A0_A7.3 _A0_A7.6 16.2,49.28 16.41,49.48 27.94,49.48 U$29.A5
A6
  Top 0.305: _A0_A7.7 A0_A7.2
A7
  Top 0.305: _A0_A7.8 A0_A7.1
A8
  Top 0.305: A8_A15.8 JP.1
A9
  Top 0.305: A8_A15.7 JP.2
A10
  Top 0.305: A8_A15.6 JP.3
A11
  Top 0.305: A8_A15.5 JP.4
A12
  Top 0.305: A8_A15.4 JP.5
A13
  Top 0.305: A8_A15.3 JP.6
A14
  Top 0.305: A8_A15.2 JP.7
A15
  Top 0.305: A8_A15.1 JP.8
D2
  Top 0.305: D7_RX0.6 JP6.3 70.81,44.4 76.2,44.4 U$29.D2 76.33,44.32 81.89,49.89 81.89,73.15 104.14,95.4 PULL_RESISTOR-M.2
  Bottom 0.305: PULL_RESISTOR-M.2 104.14,108.41 114.35,118.62 M_ENC.2
D3  (via drill 0.35)
  Top 0.305: D7_RX0.5 JP6.4 70.81,41.86 76.2,41.86 U$29.D3 | v78.44,53.8 80.97,56.34 80.97,73.15 100.03,92.2 100.03,103.58 103.02,106.58 103.02,108.61 103.63,109.22 104.65,109.22 105.56,108.31 105.56,106.27 106.17,105.66 107.49,105.66 109.22,107.39 PULL_RESISTOR-M.4
  Bottom 0.305: PULL_RESISTOR-M.4 109.22,105.92 110.24,104.9 112.27,104.9 118.67,111.3 118.67,117.35 119.89,118.57 M_ENC.6 | v78.44,53.8 78.44,43.89 76.5,41.96 76.2,41.96 U$29.D3
D4
  Top 0.305: D7_RX0.4 JP6.5 70.81,39.32 76.2,39.32 U$29.D4 76.71,39.37 82.7,45.36 82.7,73.05 110.59,100.94 110.59,108.36 109.73,109.22 108.41,109.22 106.68,107.49 PULL_RESISTOR-M.3
  Bottom 0.305: PULL_RESISTOR-M.3 106.68,109.73 111.25,114.3 115.06,114.3 116.13,115.37 116.13,117.35 117.35,118.57 M_ENC.4
D5
  Top 0.305: D7_RX0.3 JP6.6 70.81,36.78 76.2,36.78 U$29.D5
D6
  Top 0.305: D7_RX0.2 JP6.7 70.81,34.24 76.2,34.24 U$29.D6 76.71,34.29 83.31,40.89 83.31,72.75 111.76,101.19 PULL_RESISTOR-M.5 113.23,105.97 115.62,105.97 121.21,111.56 121.21,117.35 122.43,118.57 M_ENC.8
D7
  Top 0.305: D7_RX0.1 JP6.8 70.81,31.7 76.2,31.7 U$29.D7
D8
  Top 0.305: D13_D8.6 JP4.1 70.81,27.64 76.2,27.64 U$29.D8
D9
  Top 0.305: D13_D8.5 JP4.2 70.81,25.1 76.2,25.1 U$29.D9
D10
  Top 0.305: D13_D8.4 JP4.3 70.81,22.56 76.2,22.56 U$29.D10
D11
  Top 0.305: D13_D8.3 JP4.4 70.81,20.02 76.2,20.02 U$29.D11
D12
  Top 0.305: D13_D8.2 JP4.5 70.81,17.48 76.2,17.48 U$29.D12
D13
  Top 0.305: U$29.D13 76.2,14.94 76,14.73 JP4.6 D13_D8.1 64.21,14.73 53.54,4.06 D13.A
D22
  Top 0.305: JP17.3 61.77,82.3 61.77,89.41 5V_GND.4
D23
  Top 0.305: JP17.4 61.77,79.76 61.77,80.57 62.99,81.79 62.99,90.73 61.77,91.95 5V_GND.3
D24
  Top 0.305: JP17.5 59.23,82.3 59.23,89.41 5V_GND.6
D25
  Top 0.305: JP17.6 59.23,79.76 59.23,80.57 60.45,81.79 60.45,90.73 59.23,91.95 5V_GND.5
D26
  Top 0.305: JP17.7 56.69,82.3 56.69,89.41 5V_GND.8
D27
  Top 0.305: JP17.8 56.69,79.76 56.69,80.57 57.91,81.79 57.91,90.73 56.69,91.95 5V_GND.7
D28
  Top 0.305: JP17.9 54.15,82.3 54.15,89.41 5V_GND.10
D29
  Top 0.305: JP17.10 54.15,79.76 54.15,80.57 55.37,81.79 55.37,90.73 54.15,91.95 5V_GND.9
D30
  Top 0.305: JP17.11 51.61,82.3 51.61,89.41 5V_GND.12
D31  (via drill 0.35)
  Top 0.305: 5V_GND.11 51.61,91.95 52.83,90.73 52.83,81.79 51.87,80.82 51.87,79.76 JP17.12 51.56,78.94 40.13,67.51 40.13,51.61 40.94,50.8 41.86,50.8 42.67,49.99 42.67,45.52 54.46,33.73 v58.01,33.73
  Bottom 0.305: BUZZ_M.2 79.25,27.43 76.91,29.77 61.98,29.77 v58.01,33.73
D32
  Top 0.305: JP17.13 49.07,82.3 49.07,89.41 5V_GND.14
D33
  Top 0.305: JP17.14 49.07,79.76 49.07,80.57 50.29,81.79 50.29,90.73 49.07,91.95 5V_GND.13
D34
  Top 0.305: JP17.15 46.53,82.3 46.53,89.41 5V_GND.16
D35
  Top 0.305: JP17.16 46.53,79.76 46.53,80.57 47.75,81.79 47.75,90.73 46.53,91.95 5V_GND.15
D36
  Top 0.305: JP17.17 43.99,82.3 43.99,89.41 5V_GND.18
D37
  Top 0.305: JP17.18 43.99,79.76 43.99,80.57 45.21,81.79 45.21,90.73 43.99,91.95 5V_GND.17
D38
  Top 0.305: JP17.19 41.45,82.3 41.45,89.41 5V_GND.20
D39
  Top 0.305: JP17.20 41.45,79.76 41.45,80.57 42.67,81.79 42.67,90.73 41.45,91.95 5V_GND.19
D40
  Top 0.305: JP17.21 38.91,82.3 38.91,89.41 5V_GND.22
D41
  Top 0.305: JP17.22 38.91,79.76 38.91,80.57 40.13,81.79 40.13,90.73 38.91,91.95 5V_GND.21
D42
  Top 0.305: JP17.23 36.37,82.3 36.37,89.41 5V_GND.24
D43
  Top 0.305: JP17.24 36.37,79.76 36.37,80.57 37.59,81.79 37.59,90.73 36.37,91.95 5V_GND.23
D44
  Top 0.305: JP17.25 33.83,82.3 33.83,89.41 5V_GND.26
D45
  Top 0.305: JP17.26 33.83,79.76 33.83,80.57 35.05,81.79 35.05,90.73 33.83,91.95 5V_GND.25
D46
  Top 0.305: JP17.27 31.29,82.3 31.29,89.41 5V_GND.28
D47
  Top 0.305: JP17.28 31.29,79.76 31.29,80.57 32.51,81.79 32.51,90.73 31.29,91.95 5V_GND.27
D48
  Top 0.305: JP17.29 28.75,82.3 28.75,89.41 5V_GND.30
D49
  Top 0.305: JP17.30 28.75,79.76 28.75,80.57 29.97,81.79 29.97,90.73 28.75,91.95 5V_GND.29
D50
  Top 0.305: JP17.31 26.21,82.3 26.21,89.41 5V_GND.32
D51
  Top 0.305: JP17.32 26.21,79.76 26.21,80.57 27.43,81.79 27.43,90.73 26.21,91.95 5V_GND.31
D52
  Top 0.305: JP17.33 23.67,82.3 23.67,89.41 5V_GND.34
D53
  Top 0.305: JP17.34 23.67,79.76 23.67,80.57 24.89,81.79 24.89,90.73 23.67,91.95 5V_GND.33
GND  (via drill 0.35)  (1 unrouted)
  Top 0.305: v116.84,112.01 119.38,112.01 v120.14,112.78 | v47.24,50.8 49.28,48.77 v49.28,46.48
  Top 0.813: U$10.2 U$10.3
  Top 1.016: U$10.1 85.32,87.4
  Bottom 0.305: M_ENC.3 117.35,112.52 v116.84,112.01 | v120.14,112.78 122.43,112.78 122.52,112.68 v122.78,112.68
  other vias: 50.8,66.8 73.15,81.79 144.27,24.13 174.75,88.9 80.52,99.82 107.44,101.6 154.43,103.63 173.23,78.74 138.68,36.32 209.8,48.01 74.93,115.06 88.14,105.41 143.26,70.36 41.91,98.04 49.53,56.13 50.29,36.07 112.01,112.52 129.29,75.69 198.88,39.62 195.07,46.48 79.25,66.55 75.18,66.29 74.42,76.45
  pour Top (isolate 0.762): 201.93,123.44 209.55,123.44 210.57,122.43 210.57,104.39 212.34,102.62 235.46,102.62 244.09,111.25 244.09,119.38 244.6,119.89 253.49,119.89 253.49,42.42 258.57,37.34 277.56,37.34 280.92,32.79 280.92,126.75 0,126.75 0,0.25 0.25,0 280.92,0 280.92,25.65 278.89,27.69 258.32,27.69 246.13,39.88 246.13,96.01 204.72,96.01 201.93,98.81
  pour Bottom (isolate 0.762): 201.93,123.44 201.93,98.81 204.72,96.01 246.13,96.01 246.13,39.88 258.32,27.69 278.89,27.69 280.92,25.65 280.92,0 0.25,0 0,0.25 0,126.75 280.92,126.75 280.92,32.77 280.16,33.53 280.16,34.54 277.37,37.34 258.57,37.34 253.49,42.42 253.49,119.89 244.6,119.89 244.09,119.38 244.09,111.25 235.46,102.62 212.34,102.62 210.57,104.39 210.57,122.43 209.55,123.44
GND_B
  Top 5.08: BATTERY.2 U$28.2
GND_O
  Top 3.81: ESTOP.2 24_BAT.2
MISO
  Top 0.305: SV1.5 43.94,48.01 47.09,44.86 52.02,44.86 55.88,48.72 U$29.MISO
MOSI
  Top 0.305: SV1.4 41.45,52.12 42.27,52.12 43.59,53.44 52.02,53.44 53.34,52.12 U$29.MOSI
N$2
  Top 0.305: R3.2 175.26,16.76 D5.K
N$3
  Top 0.508: BUZZ-S.1 93.07,27.43 | 93.07,27.43 BUZZ_M.1 | 93.07,27.43 93.07,48.97 95.81,51.71 95.81,68.58 92.76,71.63 SG1.+
N$5
  Top 0.305: D1.K 210.57,56.9 212.34,58.67 214.88,58.67 217.42,61.21 RN1.2
N$6
  Top 0.305: D2.K 210.57,61.47 212.85,63.75 RN1.3
N$7
  Top 0.508: U$7.3 183.59,16.97 183.59,17.48 D6.K 184.91,18.8 189.59,18.8 193.24,22.45 193.24,24.69 194.06,25.5 194.26,25.5 200.15,31.39 200.15,32.61 209.91,42.37 214.07,42.37 ULN.16
N$8
  Top 0.508: D7.K 188.98,17.27 U$7.2
  Bottom 0.508: ULN.15 198.83,24.59 198.83,22.96 194.67,18.8 190.19,18.8 188.98,17.58 D7.K
N$9
  Top 0.508: D8.K 194.06,17.27 U$7.1
  Bottom 0.508: ULN.14 200.15,23.37 200.15,23.06 194.67,17.58 194.06,17.58 D8.K
N$10
  Top 0.508: MAIN_SUPPLY1.3 199.39,17.02 199.39,17.27 D9.K 200.35,17.53 200.35,21.03 ULN.13
N$12
  Top 0.508: D6.A 183.69,20.12 186.03,20.12 189.48,23.57 RN3.2
N$13
  Top 0.508: D7.A 188.98,20.52 192.02,23.57 RN3.3
N$14
  Top 0.508: D8.A 194.06,23.06 194.56,23.57 RN3.4
N$15
  Top 0.508: D9.A 199.14,21.54 197.1,23.57 RN3.5
N$16
  Top 0.508: S4.3 S4.4
  Bottom 0.508: S4.3 96.32,101.09 96.32,108.71 100.18,112.57 100.18,117.25 103.68,120.75 147.07,120.75 149.66,118.16 RESET.1
N$20
  Top 0.305: D3.K 212.09,67.82 215.65,67.82 217.17,66.29 RN1.4
N$21
  Top 0.305: D4.K 210.57,70.61 212.09,69.09 218.95,69.09 RN1.5
N$140
  Top 0.305: D13.K 14.02,4.06 14.02,8.84 R2.2
PROX_1  (via drill 0.41)
  Top 0.305: U$17.1 200.15,44.2 185.42,58.93 185.42,97.54 167.89,115.06 v167.64,115.06
  Bottom 0.305: v167.64,115.06 167.64,118.62 162.81,123.44 34.04,123.44 27.18,116.59 U$4.2
PROX_2  (via drill 0.35)
  Top 0.305: U$6.2 45.97,108.97 67.56,108.97 72.34,113.74 80.31,113.74 81.03,113.03 81.03,109.73 81.79,108.97 97.03,108.97 98.17,110.11 98.17,117.48 101.4,120.7 165.86,120.7 v197.87,88.7 | v208.71,60.2 208.71,70.55 208.72,70.56 208.72,78.55 v204.22,83.06
  Bottom 0.305: v197.87,88.7 198.49,88.08 198.49,86.83 203.24,82.08 v204.22,83.06 | v208.71,60.2 202.87,60.2 202.32,59.65 202.14,59.65 U$18.1
PROX_3  (via drill 0.41)
  Top 0.305: U$19.1 199.69,73.87 199.51,73.87 192.79,80.6 192.79,91.19 166.88,117.09 v166.78,117.09
  Bottom 0.305: v166.78,117.09 166.78,118.47 162.81,122.43 72.39,122.43 61.21,111.25 U$11.2
PROX_4
  Top 0.305: U$20.1 197.87,87.38 165.2,120.04 114.05,120.04 113.28,119.28 113.28,111.76 112.67,111.15 101.6,111.15 98.2,107.75 81.03,107.75 78.03,110.74 U$16.2
RST  (via drill 0.35)
  Top 0.305: JP13.1 RST_VIN.6 27.94,18.8 U$29.RST1 28.96,19.05 38.81,28.91 38.81,49.48 SV1.1 | S4.1 92.81,94.39 v87.68,94.39
  Bottom 0.305: v87.68,94.39 87.68,92.43 66.06,70.81 60.96,70.81 42.67,52.53 42.67,51.61 | 42.67,51.61 41.86,50.8 40.13,50.8 SV1.1 | 42.67,51.61 43.48,50.8 44.4,50.8 45.62,49.58 50.8,49.58 U$29.RST
RX0
  Top 0.305: D7_RX0.8 JP6.1 70.81,49.48 76.2,49.48 U$29.RX0
RX1
  Top 0.305: JP8.3 TX3_SCL.6
RX2
  Top 0.305: JP8.5 TX3_SCL.4
RX3  (via drill 0.35)
  Top 0.305: JP8.7 TX3_SCL.2 | v86.28,74.37 86.28,74.47 124.69,112.88 132.79,112.88 136.45,116.54 156.67,116.54 157.18,117.04 162.25,117.04 ODRIVE.2
  Bottom 0.305: v86.28,74.37 84.2,74.37 77.09,67.26 77.09,61.62 72.36,56.9 JP8.7
S-3V3A
  Top 0.305: SLAVE-7.2 104.95,24.69 112.27,24.69 S-RST_VIN1.5
S-5VS  (via drill 0.38)
  Top 0.305: SLAVE-4.1 SLAVE-4.2 S-5V_GND1.1 | SV2.6 140.21,54.56 141.43,53.34 141.43,33.88 148.54,26.77 148.54,8.43 SV3.6 | v151.28,66.45 v157.38,72.54
  Bottom 0.305: S1.1 97.54,34.54 SLAVE-7.3 104.95,27.23 112.22,27.23 S-RST_VIN1.4 112.27,27.13 120.7,18.69 137.47,18.69 147.73,8.43 148.54,8.43 SV3.6 | S-5V_GND1.1 S-5V_GND1.2 160.68,82.91 160.68,78.08 157.38,74.78 v157.38,72.54 | SV2.6 v151.28,66.45
S-A0
  Top 0.305: SLAVE-6.1 104.95,39.93 112.27,39.93 S-A0_A7.8
S-A1
  Top 0.305: SLAVE-6.2 104.95,42.47 112.27,42.47 S-A0_A7.7
S-A2
  Top 0.305: SLAVE-6.3 104.95,45.01 112.27,45.01 S-A0_A7.6
S-A3
  Top 0.305: SLAVE-6.4 104.95,47.55 112.27,47.55 S-A0_A7.5
S-A4
  Top 0.305: SLAVE-6.5 104.95,50.09 112.27,50.09 S-A0_A7.4
S-A5
  Top 0.305: SLAVE-6.6 104.95,52.63 112.27,52.63 S-A0_A7.3
S-A6
  Top 0.305: SLAVE-6.7 104.95,55.17 112.27,55.17 S-A0_A7.2
S-A7
  Top 0.305: SLAVE-6.8 104.95,57.71 112.27,57.71 S-A0_A7.1
S-A8
  Top 0.305: A5.8 104.95,62.79 112.27,62.79 S_A8_A15.1
S-A9
  Top 0.305: A5.7 104.95,65.33 112.27,65.33 S_A8_A15.2
S-A10
  Top 0.305: A5.6 104.95,67.87 112.27,67.87 S_A8_A15.3
S-A11
  Top 0.305: A5.5 104.95,70.41 112.27,70.41 S_A8_A15.4
S-A12
  Top 0.305: A5.4 104.95,72.95 112.27,72.95 S_A8_A15.5
S-A13
  Top 0.305: A5.3 104.95,75.49 112.27,75.49 S_A8_A15.6
S-A14
  Top 0.305: A5.2 104.95,78.03 112.27,78.03 S_A8_A15.7
S-A15
  Top 0.305: A5.1 104.95,80.57 112.27,80.57 S_A8_A15.8
S-D2
  Top 0.305: S-D7_RX0.6 160.53,47.55 167.34,47.55 SLAVE-2.3
  Bottom 0.305: 136.45,108.71 135.33,108.71 134.72,109.32 134.72,111.46 133.91,112.27 130.25,112.27 128.52,110.54 128.32,110.54 S-ENC.4 | 136.45,108.71 138.07,110.34 138.07,112.57 133.1,117.55 U$21.2 | 136.45,108.71 136.75,108.41 136.75,103.33 136.45,103.02 136.45,82.6 135.94,82.09 135.94,61.67 138.89,58.73 138.89,54.97 139.7,54.15 140.61,54.15 147.22,47.55 160.53,47.55 S-D7_RX0.6
S-D3
  Top 0.305: S-D7_RX0.5 160.53,45.01 167.34,45.01 SLAVE-2.4
  Bottom 0.305: S-ENC.2 133.3,110.44 133.3,104.34 U$22.2 133.81,102.92 133.81,62.89 136.35,60.35 136.35,54.97 137.16,54.15 138.07,54.15 138.89,53.34 138.89,52.43 146.3,45.01 160.53,45.01 S-D7_RX0.5
S-D4  (via drill 0.38)
  Top 0.305: SLAVE-2.5 167.34,42.47 160.53,42.47 S-D7_RX0.4 160.43,42.32 158.85,42.32 118.57,82.6 118.57,83.62 117.86,84.33 116.84,84.33 116.13,85.04 116.13,100.89 S-ENC.5 | v130.76,115.52 133.6,115.52 135.64,117.55 U$21.1
  Bottom 0.305: v130.76,115.52 S-ENC.5
S-D5  (via drill 0.38)
  Top 0.305: S-D7_RX0.3 160.53,39.93 167.34,39.93 SLAVE-2.6 169.37,41.86 169.37,42.98 168.66,43.69 159.31,43.69 v131.37,71.63 | JP1.6 140.72,105.16 v132.28,96.72
  Bottom 0.305: v132.28,96.72 131.37,95.81 v131.37,71.63
S-D6
  Top 0.305: SLAVE-2.7 167.34,37.39 160.53,37.39 S-D7_RX0.2 160.07,37.34 143.26,54.15 143.26,56.79 118.26,81.79 116.84,81.79 115.52,83.11 115.52,102.62 125.17,112.27 129.03,112.27 S-ENC.3 130.86,110.44 130.86,108.41 U$22.1
S-D7
  Top 0.305: S-D7_RX0.1 160.53,34.85 167.34,34.85 SLAVE-2.8
S-D8
  Top 0.305: S-D8_D13.10 160.53,30.79 167.34,30.79 SLAVE-1.1
S-D9
  Top 0.305: S-D8_D13.9 160.53,28.25 167.34,28.25 SLAVE-1.2
S-D10
  Top 0.305: S-D8_D13.8 160.53,25.71 167.34,25.71 SLAVE-1.3
S-D11  (via drill 0.38)
  Top 0.305: S-D8_D13.7 160.53,23.17 167.34,23.17 SLAVE-1.4 | v85.75,94.39 86.77,93.37 86.77,93.27 91.64,88.39 v93.17,88.39
  Bottom 0.305: LIMIT_SWITCH.1 26.42,101.6 26.92,102.11 43.23,102.11 50.44,94.89 85.24,94.89 v85.75,94.39 | v93.17,88.39 93.17,84.63 103.63,74.17 106.17,74.17 110.24,70.1 110.24,69.9 111.05,69.09 113.69,69.09 159.61,23.17 160.53,23.17 S-D8_D13.7
S-D12  (via drill 0.38)
  Top 0.305: S-D8_D13.6 160.53,20.62 167.34,20.62 SLAVE-1.5 | v99.06,95 97.03,97.03 88.14,97.03 80.26,104.9 v80.01,104.9
  Bottom 0.305: v80.01,104.9 11.43,104.9 LIMIT_SWITCH.2 | v99.06,95 99.06,88.9 110.24,77.72 110.24,72.44 111.05,71.63 113.49,71.63 158.5,26.62 158.5,25.2 159.31,24.38 161.75,24.38 162.56,23.57 162.56,22.66 160.53,20.62 S-D8_D13.6
S-D13
  Top 0.305: D5.A 172.72,18.09 167.44,18.09 SLAVE-1.6 167.34,18.09 160.53,18.09 S-D8_D13.5
S-D22  (via drill 0.38)
  Top 0.305: v183.59,65.13 183.29,65.13 164.08,84.33 159.21,84.33 | 159.21,84.33 157.99,83.11 S-5V_GND1.4 | SLAVE-4.3 157.99,94.49 159.21,93.27 159.21,84.33
  Bottom 0.305: v183.59,65.13 210.62,65.13 214.27,61.47 214.27,61.27 221.69,53.85 221.69,42.47 ULN.1
S-D23  (via drill 0.38)
  Top 0.305: SLAVE-4.4 S-5V_GND1.3 | U$12.1 176.78,45.72 166.12,56.39 159.31,56.39 157.38,58.32 v157.38,71.32
  Bottom 0.305: v157.38,71.32 156.46,72.24 156.46,82.3 156.77,82.6 156.77,84.23 157.99,85.45 S-5V_GND1.3
S-D24  (via drill 0.38)
  Top 0.305: v183.59,62.69 183.59,63.91 165.71,81.79 156.67,81.79 155.45,83.01 S-5V_GND1.6
  Bottom 0.305: v183.59,62.69 189.18,57.1 213.26,57.1 214.27,56.08 214.27,47.55 221.69,40.13 221.69,39.93 ULN.2 | SLAVE-4.5 155.45,94.49 156.67,93.27 156.67,85.04 155.45,83.82 S-5V_GND1.6
S-D25
  Top 0.305: SLAVE-4.6 S-5V_GND1.5 155.45,85.14 154.23,83.92 154.23,82.5 155.55,81.18 165.41,81.18 181.86,64.72 U$12.2
S-D26  (via drill 0.38)
  Top 0.305: v176.17,63.09 176.17,69.19 164.79,80.57 155.25,80.57 152.91,82.91 S-5V_GND1.8
  Bottom 0.305: v176.17,63.09 196.39,42.88 202.39,42.88 203.1,43.59 215.29,43.59 221.49,37.39 221.69,37.39 ULN.3 | SLAVE-4.7 152.91,94.49 154.13,93.27 154.13,84.33 152.91,83.11 S-5V_GND1.8
S-D27
  Top 0.305: S-5V_GND1.7 SLAVE-4.8 152.91,92.91 153.97,93.98 155.96,93.98 156.67,94.69 156.67,95.71 157.48,96.52 161.04,96.52 184.51,73.05 184.51,57.61 187.66,54.46 187.66,32.82 U$13.1
S-D28  (via drill 0.38)
  Top 0.305: v207.87,70.92 207.87,56.69 215.9,48.67 215.9,40.84 221.69,35.05 221.69,34.85 ULN.4 | v166.93,77.11 156.26,77.11 150.37,83.01 S-5V_GND1.10 150.37,83.26 151.59,84.48 151.59,93.27 150.37,94.49 SLAVE-4.9
  Bottom 0.305: v207.87,70.92 174.45,70.92 168.25,77.11 v166.93,77.11
S-D29  (via drill 0.38)
  Top 0.305: SLAVE-4.10 S-5V_GND1.9 150.11,85.34 150.11,84.68 149.15,83.72 149.15,82.5 152.6,79.05 v152.6,78.74
  Bottom 0.305: v152.6,78.74 152.6,62.18 159,55.78 167.64,55.78 190.6,32.82 192.73,32.82 U$13.2
S-D30
  Top 0.305: S-5V_GND1.12 147.83,83.82 149.05,85.04 149.05,93.98 147.83,95.2 SLAVE-4.11
S-D31  (via drill 0.38)
  Top 0.305: v136.85,61.98 113.49,38.61 106.17,38.61 96.82,29.26 96.82,27.43 BUZZ-S.2 | SLAVE-4.12 S-5V_GND1.11
  Bottom 0.305: v136.85,61.98 136.85,77.93 141.53,82.6 141.53,95.81 142.24,96.52 145.8,96.52 146.61,95.71 146.61,93.98 147.83,92.76 SLAVE-4.12
S-D32
  Top 0.305: S-5V_GND1.14 145.29,83.82 146.51,85.04 146.51,93.98 145.29,95.2 SLAVE-4.13
S-D33
  Top 0.305: SLAVE-4.14 S-5V_GND1.13
  Bottom 0.305: D1.A 213.06,55.58 212.14,55.58 206.1,49.53 200.91,49.53 U$17.3 200.76,49.12 193.6,49.12 178.71,64.01 166.12,64.01 165.41,63.3 165.41,60.05 161.75,56.39 159.31,56.39 155.25,60.45 155.25,77.32 151.79,80.77 150.88,80.77 149.15,82.5 149.15,83.52 148.34,84.33 147.32,84.33 146.1,85.55 145.29,85.55 S-5V_GND1.13
S-D34
  Bottom 0.305: S-5V_GND1.16 142.75,83.82 143.97,85.04 143.97,93.98 142.75,95.2 SLAVE-4.15
S-D35  (via drill 0.38)
  Top 0.305: SLAVE-4.16 S-5V_GND1.15 142.6,85.45 142.6,84.99 144.07,83.52 144.07,81.89 151.79,74.17 v163.58,74.17
  Bottom 0.305: D2.A 212.24,60.96 209.7,63.5 U$18.3 200.81,63.6 180.03,63.6 172.01,71.63 166.12,71.63 v163.58,74.17
S-D36
  Top 0.305: S-5V_GND1.18 140.21,83.82 138.99,85.04 138.99,93.98 140.21,95.2 SLAVE-4.17
S-D37  (via drill 0.38)
  Top 0.305: S-5V_GND1.17 SLAVE-4.18 141.48,93.98 143.26,93.98 144.07,94.79 144.07,95.81 145.39,97.13 v178.31,97.13 | v204.22,69.09 204.22,74.68 201.17,77.72 U$19.3
  Bottom 0.305: v204.22,69.09 209.4,69.09 212.14,66.34 213.06,66.34 D3.A | v178.31,97.13 181.46,97.13 200.86,77.72 U$19.3
S-D38
  Top 0.305: S-5V_GND1.20 137.67,83.82 136.45,85.04 136.45,93.98 137.67,95.2 SLAVE-4.19
S-D39
  Top 0.305: SLAVE-4.20 S-5V_GND1.19 | U$20.3 200.86,92.46 206.04,87.27 206.04,84.84 213.06,77.83 213.06,71.63 D4.A
  Bottom 0.305: SLAVE-4.20 137.67,93.47 138.99,94.79 138.99,106.99 140.92,108.92 184.2,108.92 U$20.3
S-D40
  Top 0.305: S-5V_GND1.22 135.13,83.82 133.91,85.04 133.91,93.98 135.13,95.2 SLAVE-4.21
S-D41
  Top 0.305: SLAVE-4.22 S-5V_GND1.21
S-D42
  Top 0.305: S-5V_GND1.24 132.59,83.82 131.37,85.04 131.37,93.98 132.59,95.2 SLAVE-4.23
S-D43
  Top 0.305: SLAVE-4.24 S-5V_GND1.23
S-D44
  Top 0.305: S-5V_GND1.26 130.05,83.82 128.83,85.04 128.83,93.98 130.05,95.2 SLAVE-4.25
S-D45
  Top 0.305: SLAVE-4.26 S-5V_GND1.25
S-D46
  Top 0.305: S-5V_GND1.28 127.51,83.82 126.29,85.04 126.29,93.98 127.51,95.2 SLAVE-4.27
S-D47
  Top 0.305: SLAVE-4.28 S-5V_GND1.27
S-D48
  Top 0.305: S-5V_GND1.30 124.97,83.82 123.75,85.04 123.75,93.98 124.97,95.2 SLAVE-4.29
S-D49
  Top 0.305: SLAVE-4.30 S-5V_GND1.29
S-D50
  Top 0.305: S-5V_GND1.32 122.43,83.82 121.21,85.04 121.21,93.98 122.43,95.2 SLAVE-4.31
S-D51
  Top 0.305: SLAVE-4.32 S-5V_GND1.31
S-D52
  Top 0.305: S-5V_GND1.34 119.89,83.82 118.67,85.04 118.67,93.98 119.89,95.2 SLAVE-4.33
S-D53
  Top 0.305: SLAVE-4.34 S-5V_GND1.33
S-MISO
  Top 0.305: SV2.5 140.21,15.95 147.32,8.84 147.32,7.11 SV3.5
S-MOSI
  Top 0.305: SV2.4 136.45,54.15 136.45,17.98 SV3.4
S-RST
  Top 0.305: SV3.1 139.45,5.84 123.19,22.1 | S-RST_VIN1.6 123.19,22.1 | 123.19,22.1 135.13,34.04 SV2.1
  Bottom 0.305: SV2.1 118.36,69.6 118.36,78.74 100.84,96.27 99.06,96.27 S4.2 | SLAVE-7.1 S-RST_VIN1.6
S-RX0
  Top 0.305: S-D7_RX0.8 160.53,52.63 167.34,52.63 SLAVE-2.1
S-RX1
  Top 0.305: S-TX3_SCL1.6 160.53,70.41 167.34,70.41 SLAVE-3.3
S-RX2
  Top 0.305: S-TX3_SCL1.4 160.53,65.33 167.34,65.33 SLAVE-3.5
S-RX3  (via drill 0.38)
  Top 0.305: S-TX3_SCL1.2 160.53,60.25 167.34,60.25 SLAVE-3.7 | v153.01,99.47 JP1.4
  Bottom 0.305: v153.01,99.47 156.77,95.71 156.77,94.69 157.48,93.98 158.5,93.98 159.31,93.17 159.31,88.59 162.56,85.34 162.56,62.28 160.53,60.25 S-TX3_SCL1.2
S-SCK
  Top 0.305: SV2.3 137.67,53.65 138.99,54.97 138.99,55.88 139.7,56.59 140.72,56.59 142.65,54.66 142.65,36.63 149.86,29.41 149.86,5.39 149.05,4.57 147.32,4.57 SV3.3
S-SCL
  Top 0.305: S-TX3_SCL1.8 160.53,75.49 167.34,75.49 SLAVE-3.1
  Bottom 0.305: SLAVE-3.1 166.01,76.81 166.01,77.42 168.35,79.76 168.35,106.38 IMU_SLAVE.1
S-SDA
  Top 0.305: S-TX3_SCL1.7 160.53,72.95 167.34,72.95 SLAVE-3.2
  Bottom 0.305: SLAVE-3.2 165.41,74.88 165.41,77.72 165.81,78.13 165.81,106.38 IMU_SLAVE.2
S-TX0
  Top 0.305: S-D7_RX0.7 160.53,50.09 167.34,50.09 SLAVE-2.2
S-TX1  (via drill 0.38)
  Top 0.305: S-TX3_SCL1.5 160.53,67.87 167.34,67.87 SLAVE-3.4 173.03,62.18 176.48,62.18 v179.63,65.33
  Bottom 0.305: v179.63,65.33 184.3,70 234.29,70 240.49,76.2 SABER1.1
S-TX2
  Top 0.305: S-TX3_SCL1.3 160.53,62.79 167.34,62.79 SLAVE-3.6
  Bottom 0.305: SLAVE-3.6 188.87,41.25 215.09,41.25 220.17,36.17 222.71,36.17 224.03,34.85 230.83,34.85 SABER2.1
S-TX3
  Top 0.305: S-TX3_SCL1.1 160.53,57.71 167.34,57.71 SLAVE-3.8
  Bottom 0.305: JP1.5 151.69,98.25 151.69,81.79 155.85,77.62 155.85,62.38 160.53,57.71 S-TX3_SCL1.1
SCK
  Bottom 0.305: SV1.3 41.45,49.48 42.27,49.48 43.59,48.16 52.02,48.16 53.34,49.48 U$29.SCK
SCL
  Top 0.305: U$29.SCL 76.2,4.88 76.5,4.88 78.44,6.81 78.44,28.25 77.32,29.36 62.99,29.36 58.93,33.43 58.93,49.58 57.71,50.8 57.71,65.58 TX3_SCL.8 JP8.1 68.43,74.32 68.43,94.84 75.59,102.01 75.59,112.37 76.1,112.88 79.6,112.88 80.16,112.32 80.16,109.53 81.33,108.36 97.48,108.36 100.89,111.76 102.41,111.76 106.68,116.03 IMU_M.2
SDA  (via drill 0.35)
  Top 0.305: TX3_SCL.7 JP8.2 70.71,69.7 75.69,69.7 v94.89,88.9
  Bottom 0.305: JP8.2 69.16,69.6 67.97,68.4 67.97,52.88 68.5,52.35 74.57,52.35 77.42,55.19 80.67,55.19 81.58,54.28 81.58,40.39 86.16,35.81 89.2,35.81 91.97,38.58 96.24,38.58 97,37.82 97,36.53 96.27,35.79 93.9,35.79 92.96,34.85 92.96,23.88 76.5,7.42 76.2,7.42 U$29.SDA | IMU_M.1 109.22,115.82 102.72,109.32 102.72,102.21 95.02,94.51 95.02,89.03 v94.89,88.9
TX0
  Top 0.305: D7_RX0.7 JP6.2 70.81,46.94 76.2,46.94 U$29.TX0
TX1
  Top 0.305: JP8.4 TX3_SCL.5
TX2
  Top 0.305: JP8.6 TX3_SCL.3
TX3
  Top 0.305: JP8.8 TX3_SCL.1
  Bottom 0.305: ODRIVE.1 160.48,121.46 99.85,121.46 92.15,113.77 92.15,99.31 88.9,96.06 88.9,71.12 72.14,54.36 JP8.8
VBAT
  Top 1.27: BATTERY.1 MAIN_SUPPLY.1 | BATTERY.1 189.48,117.35 | 189.48,117.35 189.48,116.59 195.58,116.59 MAIN_SUPPLY.1 | MAIN_SUPPLY.1 195.58,120.9 189.48,120.9 BATTERY.1 | 189.48,117.35 194.82,117.35 194.82,119.89 190.25,119.89 190.25,119.13 194.31,119.13 195.07,118.36 MAIN_SUPPLY.1 | MAIN_SUPPLY.1 195.58,115.57 189.48,115.57 BATTERY.1
VIN  (via drill 0.35)
  Top 0.305: JP13.6 RST_VIN.1 16.46,31.5 16.66,31.7 27.94,31.7 U$29.VIN | S-RST_VIN1.1 112.27,34.85 104.95,34.85 SLAVE-7.6 102.92,32.82 102.92,31.09 97.23,25.4 86.87,25.4 82.3,29.97 63.3,29.97 61.98,31.29 v61.98,31.6
  Bottom 0.305: U$1.OUT+ 244.04,59.44 244.04,45.42 232.05,33.43 220.17,33.43 215.09,28.35 211.63,28.35 199.64,16.36 164.69,16.36 161.75,19.3 127.71,19.3 112.27,34.75 S-RST_VIN1.1 | v61.98,31.6 58.93,34.65 57.71,34.65 54.86,31.8 27.94,31.8 U$29.VIN
(copper drawn outside any net)
  shapes: Top area x2

## Text on the board
tNames: ES2 | ES1 | GND | VBAT | 12V | 12V_B | 12V_M | GND | VCC | GND | VCC | GND | VCC | GND | PROX4 | VCC | VCC | D2 | D4 | D3 | D6 | GND | VCC | PROX1 | PROX2 | PROX3 | GND | GND | 5V | SD2 | SD4 | 5V | GND | SCL | SDA | RX3 | TX3 | GND | + | - | + | - | NC | 5V BUCK | GND | 5V | RESET DIP | 5V | S-RX3 | GND | SDA | SCL | OUT- | IN- | 5V | SD3 | SD6 | GND | S-TX3 | L1 | S-D5 | RESET DIP | 3.3V | 5V | GND | L2 | GND | S52 | S50 | S48 | S46 | S44 | S42 | S40 | S38 | S36 | S34 | S32 | S30 | S28 | S26 | S24 | S22 | 5V | VCC | GND | 53 | 51 | 49 | 47 | 45 | 43 | 41 | 39 | 37 | 35 | 33 | 31 | 29 | 27 | 25 | 23 | 5V | OUT+ | IN+ | VCC | RST | S-RST | GND | S53 | S51 | S49 | S47 | S45 | S43 | S41 | S39 | S37 | S35 | S33 | S31 | S29 | S27 | S25 | S23 | 5V | VCC | GND | 52 | 50 | 48 | 46 | 44 | 42 | 40 | 38 | 36 | 34 | 32 | 30 | 28 | 26 | 24 | 22 | 5V | A15 | A14 | GND | S-TX1 | A15 | SCL | A14 | A13 | A12 | SDA | A13 | SCL | A12 | A11 | RX1 | SDA | A10 | TX1 | A11 | RX1 | SLAVE | A10 | A9 | RX2 | TX1 | A8 | TX2 | A9 | RX2 | BUZZER | OUT+ | OUT- | A8 | RX3 | MASTER | TX2 | TX3 | A7 | GND | S-MOSI | S-5V | RX3 | A6 | A7 | TX3 | RX0 | A6 | A5 | VIN BUCK | A4 | S-RST | S-SCK | S-MISO | TX0 | A5 | RX0 | S2 | A4 | A3 | TX0 | A2 | S3 | A3 | D2 | GND | A2 | A1 | S4 | D3 | 5V-DIP | A0 | A1 | D4 | S5 | GND | A0 | S6 | D5 | VIN | S-TX2 | D6 | S7 | VIN | GND | D7 | S8 | GND | GND | VCC | S9 | D8 | 5V | GND | S10 | D9 | 3V3 | 5V | S11 | D10 | RST | 3V3 | S12 | D11 | RST | S13 | D12 | D13 | IN+ | IN- | ICSP-S | ROBOTICS RESEARCH LAB | GND | GND | GND | GND | 24V | GND | U1 | U2 | U3 | U4 | VCC | VCC | 24V
bNames: S-D23 | S-D25 | S-D27 | S-D29 | 5V | GND